# EAGLE board V1_Motor con soporte negro (EAGLE 5.09)

Size 25.9 x 23.93 mm. Coordinates in mm from the lower left corner, seen from the top.
Outline: 3.95,23.93 21.96,23.93 arc-144 24.27,16.76 24.27,0 1.64,0 1.64,16.76 arc-144 3.95,23.93
Copper layers (1*16): Top 0.035mm / dielectric 1.5mm / Bottom 0.035mm
Design rules "default": minimum track width 10mil, minimum drill 24mil, track to track 8mil, track to pad 8mil, pad to pad 8mil, via to via 8mil, smd to smd 8mil, copper to edge 40mil, drill to drill 8mil, minimum pad ring 10mil, minimum via ring 8mil, stop-mask expansion 4mil, vias tented up to drill 0mil, thermal gap 10mil
Holes 2.8 mm at 3.95,3.86 21.96,3.86

## Footprints (pad centres in the part's own frame; a part is rotated, then mirrored left to right if it is on the bottom)
SOPORTE_MICROMOTOR = hole 2.2: -1.5,7.5; 16.5,7.5

## Placement (x,y rotation side)
E$1  [SOPORTE_MICROMOTOR]  5.43,12.48 0 top
E$2  [IMAGEN_MJ]  12.54,12.22 0 bottom
E$5  [MICROMOTOR]  6.97,0 0 top

## Library data of the parts
E$1 E$2 E$5 = Robot

## Text on the board
Bottom: RESAJ | RESAJ